# Altium PCB EMI-11-AF-001_IdtBV1.PcbDoc (part 2 of 2)
Units mm, origin at the board's own origin, x right, y up, seen from the top; angles counter-clockwise.
Board outline 22 x 20.01 mm, 4 copper layers (Top, Signal 1, Signal 2, Bottom), stack 1.02 mm thick; 56 components, 40 nets, 164 pads, 99 vias.
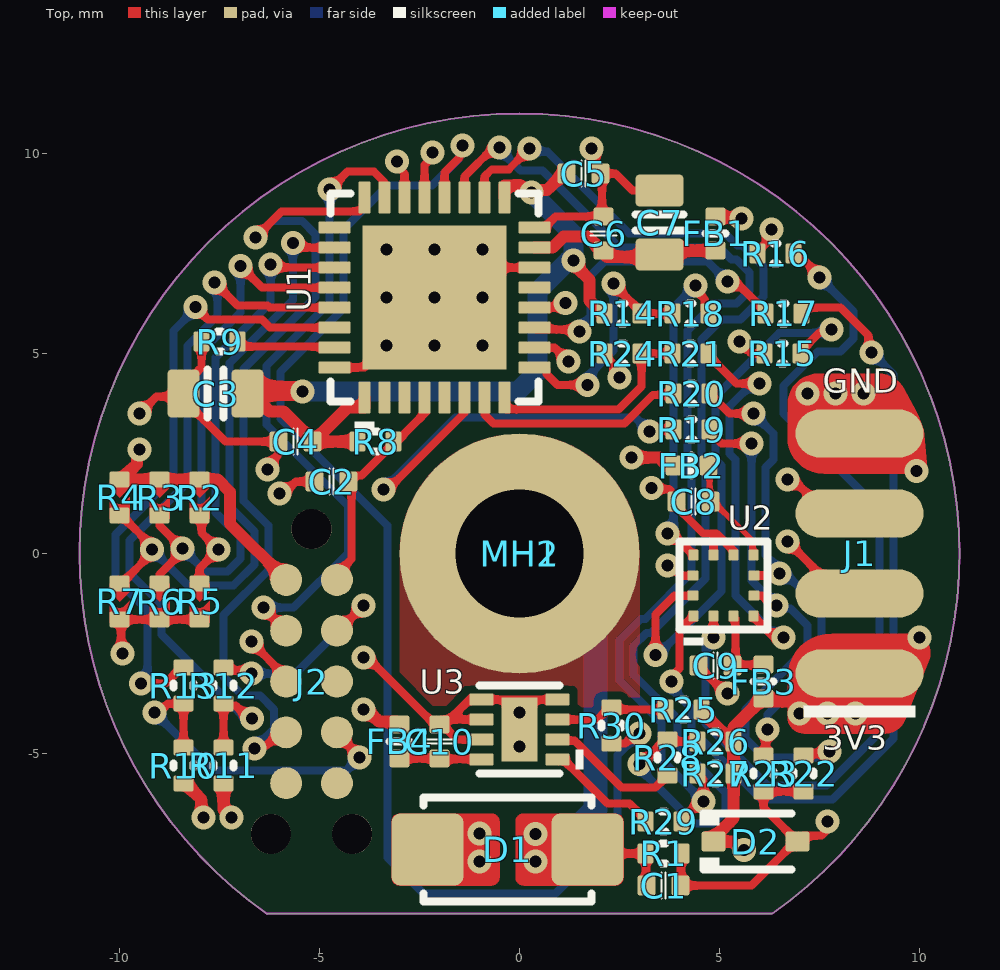
[diagram p0: Top view]

## Via types
v1: diameter 0.6, hole 0.3, Top to Bottom, tented both sides, 88 vias
v2: diameter 0.7, hole 0.3, Top to Bottom, tented bottom, 9 vias
v3: diameter 0.7, hole 0.3, Top to Bottom, tented both sides, 2 vias

## Nets (pads, with @x,y where several pads share a name; then routed paths per layer and width w, separated by ;. In a path a pad name is that pad's centre, name@x,y a point inside that pad or via, vN(x,y) a via of type N, cw(c..) or ccw(c..) an arc to the next point about the centre after c; other vN are vias at no path point) (continued)
DBG_UART.RX: (continued)
  Bottom w0.2: v1(-9.461,-3.25) -9.3,-3.089 -9.3,-1.425 -10.1,-0.625 -10.1,0.473 -8.65,1.923 -8.65,5.569 -8.105,6.114 v1(-8.105,6.165)
DBG_UART.TX: R11.2 R12.2 U1.29 | length 18.3
  Top w0.2: v1(-7.625,6.775) -7.05,6.2 -6.338,6.2 ; R11.2@-7.4,-4.8 -7.4,-3.8 -7.1,-3.8 -6.775,-4.125 v1(-6.685,-4.125) ; -6.338,6.2 -6.296,6.2 -6.246,6.15 U1.29
  Bottom w0.2: v1(-7.625,6.775) -7.55,6.7 -7.55,5.943 -8.3,5.193 -8.3,1.778 -9.75,0.328 -9.75,-0.48 -8.95,-1.28 -8.95,-2.023 -6.848,-4.125 v1(-6.685,-4.125)
GND: C1.1 C2.2 C3.2 C4.2 C5.2 C6.2 C7.2 C8.2 C9.2 C10.2 D1.1 D2.2 J1.4 J2.3 R1.1 R5.2 R6.2 R7.2 R9.2 R22.2 R23.2 R24.2 U1.14 U1.16 U1.32 U1.33 U2.8 U2.9 U2.11 U3.4 U3.5 U3.6 U3.7 U3.9 | length 45
  Top w0.2: v1(-9.925,-2.5) -9.963,-2.463 -9.963,-1.687 R7.2 R6.2 R5.2 ; v1(-9.5,3.5) -9.076,3.924 C3.2@-8.504,3.924 ; R9.2 -7.95,4.65 -8.4,4.2 C3.2 -8.476,3.924 C3.2@-8.504,3.924 ; v1@-6.733,-2.19 -5.835,-3.087 J2.3 ; v1(-6.3,2.1) -6.3,2.208 -6.025,2.483 C4.2 -7.35,2.8 -8.073,3.523 -8.103,3.523 C3.2@-8.504,3.924 ; v1(-6,1.5) -5.892,1.5 -5.592,1.8 C2.2 ; U1.32 -3.875,4.65 v2(-3.325,5.2) v2(-2.125,6.4) -1.375,7.15 U1.14 ; v1(-3.9,-2.6) -3.8,-2.6 -2.1,-4.3 C10.2@-2,-4.2 ; U3.7 -1.55,-4.65 C10.2@-2,-4.2 ; U3.6 -1.75,-4.15 ; U1.16 0.625,8.15 0.9,8.425 C6.2 2.062,8.463 2.062,9.462 C5.2 ; U3.4 U3.5 -1.25,-3.65 -1.75,-4.15 ; v1(1.8,10.125) 1.8,10.017 1.9,9.918 1.9,9.625 C5.2 ; R24.2 2.125,4.95 2.423,4.652 2.423,4.477 v1(2.5,4.4) ; v1(3.303,1.639) 3.332,1.609 3.739,1.609 3.925,1.424 C8.2 3.925,1.17 4.595,0.5 4.85,0.5 ; C7.2 2.825,9.075 2.4,9.5 C5.2 ; v1(3.7,-0.3) 3.7,-0.2 4.05,-0.55 U2.11 ; R1.1 4.038,-7.513 4.038,-8.287 C1.1 5.8,-8.3 D2.2@6.9,-7.2 ; C9.2 4.475,-2.825 5.15,-3.5 v1(5.2,-3.5) ; U2.9 4.85,0.5 ; U2.8 5.35,0.075 4.925,0.5 4.85,0.5 ; R23.2 6.1,-6.35 D2.2 7.1,-7.05 7.55,-7.05 7.7,-6.9 v1(7.7,-6.7) ; R23.2@6.15,-5.95 R22.2 ; C10.2@-2,-4.2 -1.95,-4.15 -1.75,-4.15
  other v1: -1,-7.7 -1,-7 -6.7,-2.2 9.926,2.069 7.2,4 7.9,4 8.6,4
  other v2: -2.125,5.2 -0.925,5.2 -3.325,6.4 -0.925,6.4 -3.325,7.6 -2.125,7.6 -0.925,7.6
  other v3: 0,-4.825 0,-3.975
I2C.SCL: R26.2 R28.2 U1.18 | length 30.2
  Top w0.2: U1.18 -0.875,9.425 -0.693,9.607 -0.269,9.607 0.247,10.122 0.247,10.125 v1(0.25,10.125) ; v1(3,-5.267) 3.034,-5.267 3.65,-4.65 R28.2 3.75,-4.7 R26.2
  Bottom w0.2: v1@0.446,10.125 0.35,10.125 v1(0.25,10.125) 0.327,10.049 0.694,10.049 2.743,8 5.143,8 5.443,7.7 5.573,7.7 6.1,7.173 6.1,6.427 5.523,5.85 5.05,5.85 4.55,5.35 4.55,2.205 4.65,2.105 4.65,-0.623 3.288,-1.984 3.176,-1.984 2.854,-2.307 2.854,-3.031 3.95,-4.128 3.95,-4.772 5.15,-5.972 5.15,-6.428 4.828,-6.75 4.372,-6.75 3,-5.378 v1(3,-5.267)
I2C.SDA: R27.2 R29.2 U1.19 | length 26.7
  Top w0.2: U1.19 -1.375,9.425 -0.643,10.157 v1(-0.5,10.157) ; R29.2 4.05,-6.65 4.5,-6.2 v1(4.6,-6.2) 4.6,-5.65 R27.2
  Bottom w0.2: v1(-0.5,10.157) -0.5,10.098 0.022,9.575 0.573,9.575 2.498,7.65 4.998,7.65 5.298,7.35 5.428,7.35 5.75,7.028 5.75,6.572 5.428,6.25 4.875,6.25 4.2,5.575 4.2,2.06 4.3,1.96 4.3,-0.478 3.143,-1.634 3.031,-1.634 2.504,-2.162 2.504,-3.176 3.55,-4.223 3.55,-5.15 v1(4.6,-6.2)
MCU_HW_VER0: R4.2 R7.1 U1.26 | length 15.6
  Top w0.2: R7.1 -9.95,-0.75 -9.193,0.007 v1(-9.193,0.107) -9.193,0.193 -9.95,0.95 R4.2 ; v1(-5.669,7.769) -5.55,7.65 U1.26
  Bottom w0.2: v1(-9.193,0.107) -8.287,-0.8 -7.156,-0.8 -6.628,-0.272 -6.628,0.55 -7.25,1.172 -7.25,4.758 -5.669,6.339 v1(-5.669,7.769)
MCU_HW_VER1: R3.2 R6.1 U1.27 | length 13.7
  Top w0.2: R6.1 -9,-0.525 -8.502,-0.027 -8.502,0.048 v1(-8.425,0.125) ; R3.2 -9,0.7 v1@-8.502,0.202 ; v1(-6.225,7.225) -6.15,7.15 U1.27
  Bottom w0.2: v1(-8.425,0.125) -7.85,-0.45 -7.301,-0.45 -6.978,-0.127 -6.978,0.405 -7.6,1.027 -7.6,4.903 -6.225,6.278 v1(-6.225,7.225)
MCU_HW_VER2: R2.2 R5.1 U1.28 | length 12.4
  Top w0.2: R5.1 -8,-0.372 v1(-7.528,0.1) -7.95,0.522 -7.95,0.95 R2.2 ; v1(-6.975,7.186) -6.439,6.65 U1.28
  Bottom w0.2: v1(-7.528,0.1) -7.528,0.105 -7.95,0.527 -7.95,5.048 -6.975,6.023 v1(-6.975,7.186)
NetC6_1: C6.1 C7.1 FB1.1 U1.15 | length 5
  Top w0.3: U1.15 0.827,7.65 1.075,7.898 1.102,7.924 1.695,7.924 2.12,7.5 2.1,7.5 2.188,7.413 3.488,7.413 3.65,7.575 FB1.1
NetC8_1: C8.1 FB2.1 U2.7 | length 2.7
  Top w0.15: FB2.1 4.75,2.175 4.75,1.399 5.824,0.325 5.824,-0.011 U2.7
NetC9_1: C9.1 FB3.1 U2.3 | length 2.1
  Top w0.2: C9.1 C9.1@5.338,-2.788 ; U2.3 5.35,-1.575 5.4,-1.625 5.4,-2.725 C9.1@5.338,-2.788 ; FB3.1 6.088,-2.788 C9.1@5.338,-2.788
NetC10_1: C10.1 FB4.1 U3.8 | length 2.1
  Top w0.2: FB4.1 C10.1 -1.988,-5.138 -0.963,-5.138 U3.8
NetJ2_7: J2.7 R10.2 R13.1 | length 8.6
  Top w0.2: v1(-9.125,-3.975) -9.017,-3.975 -8.792,-3.75 R13.1 R10.2 ; J2.7 -4.565,-4.502 -4,-5.068 v1(-4,-5.1)
  Bottom w0.2: v1(-9.125,-3.975) -7.675,-5.425 -4.325,-5.425 v1(-4,-5.1)
NetJ2_9: J2.9 R12.1 | length 5.3
  Top w0.2: R12.1@-7.4,-2.8 -7.277,-2.923 -6.777,-2.923 v1(-6.7,-3) ; J2.9 -4.548,-1.948 v1(-3.9,-1.3)
  Bottom w0.2: v1@-6.738,-2.962 v1(-6.7,-3) -5.6,-3 v1(-3.9,-1.3)
NetR9_1: R9.1 U1.31 | length 2.4
  Top w0.2: R9.1@-6.975,5.2 -6.95,5.175 -4.65,5.175 U1.31
NetR15_1: R15.1 U2.12 | length 14
  Top w0.2: v1(3.404,-2.534) 3.4,-2.531 3.4,-1.522 3.872,-1.05 U2.12 ; R15.1 7.025,5.05 7.499,5.523 7.723,5.523 v1(7.8,5.6)
  Bottom w0.2: v1(3.404,-2.534) 3.457,-2.534 5.05,-0.942 5.05,0.218 5.05,2.2 4.9,2.35 4.9,3.922 5.728,4.75 6.493,5.515 v1@7.8,5.515
NetR16_1: R16.1 U2.2 | length 22.9
  Top w0.2: v1(4.85,-2.1) U2.2 ; R16.1@6.925,7.5 6.95,7.5 7.5,6.95 v1(7.5,6.9)
  Bottom w0.2: v1(4.85,-2.1) 4.65,-2.3 4.65,-4.25 6.2,-5.8 7.678,-5.8 9,-4.478 9,1.1 6.6,3.5 6.6,4.192 7.458,5.05 8.028,5.05 8.35,5.372 8.35,6.05 v1(7.5,6.9)
NetR17_1: R17.1 U2.1 | length 22.1
  Top w0.2: v1(3.8,-3.2) 3.8,-3.078 4,-2.878 4,-1.912 U2.1 ; R17.1 7.05,6.05 7.15,6.15 8.028,6.15 8.724,5.454 8.724,5.102 v1(8.8,5.025)
  Bottom w0.2: v1(3.8,-3.2) 3.8,-3.373 4.3,-3.873 4.3,-4.4 6.05,-6.15 7.823,-6.15 9.35,-4.623 9.35,4.476 v1(8.8,5.025)
NetR18_1: R18.1 U2.10 | length 8.2
  Top w0.2: v1(3.7,0.5) 3.813,0.5 U2.10 ; v1(4.4,6.7) 4.4,6.592 4.625,6.367 4.625,6.1 R18.1
  Bottom w0.2: v1(3.7,0.5) 3.7,0.608 3.85,0.758 3.85,1.408 3.853,1.411 3.853,1.912 3.85,1.915 3.85,6.15 v1(4.4,6.7)
NetR19_1: R19.1 R22.1 U2.5 | length 13.7
  Top w0.2: R19.1 4.75,3.05 5.05,2.75 v1(5.8,2.75) ; U2.5 6.067,-1.05 6.317,-1.3 v1(6.425,-1.3) ; R22.1 7.15,-5 7.7,-5 v1(7.75,-4.95)
  Bottom w0.2: v1(5.8,2.75) 5.8,-0.675 v1(6.425,-1.3) 6.497,-1.372 6.772,-1.372 7.2,-1.8 7.2,-2.35 5.65,-3.9 5.65,-4.628 6.122,-5.1 7.6,-5.1 v1(7.75,-4.95)
NetR20_1: R20.1 R23.1 U2.6 | length 12
  Top w0.2: R20.1 5.25,3.5 v1(5.845,3.5) ; U2.6 v1@6.45,-0.55 ; R23.1 6.15,-5 6.15,-4.45 v1(6.2,-4.4)
  Bottom w0.2: v1(5.845,3.5) 6.35,2.995 6.35,2.35 6.15,2.15 6.15,-0.042 6.5,-0.392 v1(6.5,-0.5) 6.648,-0.5 7.55,-1.402 7.55,-2.672 6.2,-4.022 v1(6.2,-4.4)
NetR21_1: R21.1 U2.4 | length 10
  Top w0.2: R21.1 4.725,4.95 5.425,4.25 v1(6.006,4.25) ; U2.4 5.85,-1.575 6.375,-2.1 v1(6.6,-2.1)
  Bottom w0.2: v1(6.006,4.25) 5.817,4.25 5.25,3.683 5.25,2.495 5.4,2.345 5.4,-1.053 6.447,-2.1 v1(6.6,-2.1)
NetR25_2: R25.2 R30.1 U3.3 | length 2.8
  Top w0.2: U3.3 1.95,-4.15 2.25,-3.85 R30.1 2.35,-3.9 R25.2
NetR28_1: R28.1 U3.2 | length 3.4
  Top w0.2: U3.2 0.975,-4.675 1.375,-4.675 2.55,-5.85 3.4,-5.85 R28.1
NetR29_1: R29.1 U3.1 | length 2.9
  Top w0.2: U3.1 1.1,-5.15 2.2,-6.25 2.75,-6.25 3.15,-6.65 R29.1
nRST: C2.1 J2.10 R8.2 U1.4 | length 5.6
  Top w0.2: J2.10 -4.565,-0.498 -4.2,-0.132 -4.2,1.8 -4.05,1.95 -3.95,1.95 -3.1,2.8 -3.05,2.8 -2.9,2.95 -2.9,2.975 -2.375,3.5 U1.4
SHIELD: C1.2 D1.2 MH1.1 R1.2 | length 11.9
  Top w0.2: D1.2 1.8,-7.5 R1.2 3.163,-7.512 3.163,-8.287 C1.2
  Bottom w0.6: MH1.1 1.9,-1.9 1.9,-6.4 1.29,-7.01 v1(0.4,-7.01) v1(0.4,-7.7)
SPI.MISO: R17.2 U1.11 | length 7.8
  Top w0.2: U1.11 0.425,5.6 1.45,5.6 v1(1.5,5.55) ; v1(5.2,6.8) 5.4,6.8 6.15,6.05 R17.2
  Bottom w0.2: v1(1.5,5.55) 1.5,5.65 1.774,5.925 1.774,6.952 2.122,7.3 4.7,7.3 v1(5.2,6.8)
SPI.MOSI: R16.2 U1.12 | length 7.6
  Top w0.2: U1.12 1.039,6.15 v1(1.15,6.261) ; v1@1.015,6.15 v1@1.027,6.138 ; R16.2@5.9,7.5 6.227,7.827 6.227,8.02 v1(6.304,8.096)
  Signal 2 w0.2: v1(1.15,6.261) 1.211,6.2 2.867,6.2 4.017,7.35 5.55,7.35 6.296,8.096 v1(6.304,8.096)
SPI.SCK: R15.2 U1.10 | length 6.2
  Top w0.2: U1.10 0.875,5.15 v1(1.225,4.8) ; v1(5.5,5.3) 5.8,5 R15.2
  Signal 2 w0.2: v1(1.225,4.8) 2.122,4.8 2.622,5.3 v1(5.5,5.3)
SWD.SWCLK: J2.4 U1.24 | length 21.3
  Top w0.2: v1(-6.625,-4.875) -6.549,-4.799 -6.326,-4.799 -5.997,-4.47 J2.4 ; v1(-6.6,7.9) -5.95,8.55 -4.425,8.55 -4.013,8.55 -3.875,8.688 U1.24
  Bottom w0.2: v1(-6.625,-4.875) -6.135,-4.385 -6.135,-3.897 -6.483,-3.55 -6.928,-3.55 -7.4,-3.078 -7.4,-1.539 -6.278,-0.417 -6.278,0.695 -6.9,1.317 -6.9,4.613 -5.1,6.413 -5.1,7.978 -5.441,8.319 -6.181,8.319 v1(-6.6,7.9)
SWD.SWDIO: J2.2 U1.23 | length 16.6
  Top w0.2: v1(-6.4,-1.35) -6.4,-1.365 J2.2 ; -4.437,9.394 -4.732,9.1 v1(-4.75,9.1) -4.3,9.55 -3.644,9.55 -3.375,9.281 U1.23
  Bottom w0.2: v1(-6.4,-1.35) -5.65,-1.35 -4.292,0.008 -4.292,1.192 -6.331,3.231 -6.331,4.687 -4.75,6.268 v1(-4.75,9.1)
TS_ALERT: R30.2 U1.20 | length 32.9
  Top w0.2: U1.20 -1.875,9.525 -1.502,9.898 ; R30.2 2.642,-4.75 2.892,-4.5 v1(3,-4.5)
  Bottom w0.2: v1(-1.425,10.2) -1.502,10.123 -1.502,9.889 -2.188,9.203 -3.297,9.203 -4.4,8.1 -4.4,6.123 -5.981,4.542 -5.981,3.376 -3.3,0.695 -3.3,-7.6 -2.4,-8.5 0.9,-8.5 2.45,-6.95 2.45,-5.039 2.989,-4.5 v1(3,-4.5)
pads on no net: J2.0 J2.5 J2.6 J2.8 U1.2 U1.3 U1.5 U1.13 U1.25

## Polygon pours and split planes (outlines as drawn)
3V3 on Signal 2 "Signal 2-GND" (solid, remove dead copper, pour order 26): -6.308,-9 6.324,-9 ccw(c-0.056,0.029) 11,0 ccw(c0.029,0.029) 0,11 ccw(c-0.103,0.103) -11,0 ccw(c-0.413,-0.204)
GND on Signal 2 "Signal 2-GND 1" (solid, remove dead copper, pour order 24): 3.2,-4.2 3.2,0 ccw(c0,0) -3.2,0 -3.2,-4.2 ccw(c-1.899,-4.2) -1.898,-5.501 1.898,-5.501 ccw(c1.898,-4.2)
GND on Signal 1 "Signal 1-GND" (solid, remove dead copper, pour order 22): -6.308,-9 6.324,-9 ccw(c-0.056,0.029) 11,0 ccw(c0.029,0.029) 0,11 ccw(c-0.103,0.103) -11,0 ccw(c-0.413,-0.204)
SHIELD on Top "Top-SHIELD" (solid, pour order 18): -3,0 cw(c0,0) 3,0 3,-4.3 -3,-4.3
GND on Bottom "Bottom-GND" (solid, remove dead copper, pour order 28): -6.308,-9 6.324,-9 ccw(c-0.056,0.029) 11,0 ccw(c0.029,0.029) 0,11 ccw(c-0.103,0.103) -11,0 ccw(c-0.413,-0.204)

## Keep-outs
Keep-Out Layer:
  lines w0.05: -6.308,-9.012 cw(c0,0) -11,0 cw(c0,0) 11,0 cw(c0,0) 6.324,-9 -6.308,-9

## Other copper
Top:
  region net 3V3: 7.1,-4.5 9.152,-4.5 ccw(c9.152,-3.984) 9.632,-4.175 10.239,-2.653 ccw(c9.797,-2.477) 9.797,-2 7.8,-2 ccw(c7.8,-3.1) 6.7,-3.1 6.7,-4.1 ccw(c7.1,-4.1)
  region net GND: 10.2,2 7.6,2 cw(c7.6,2.9) 6.7,2.9 6.7,3.722 cw(c7.478,3.722) 7.478,4.5 8.958,4.5 cw(c8.958,3.728) 9.684,3.99 9.93,3.531 cw(c8.399,2.71) 10.047,3.259 10.1,3.1
  region net SHIELD: 2.6,-6.7 2.6,-8.1 cw(c2.4,-8.1) 2.4,-8.3 0.1,-8.3 cw(c0.1,-8.1) -0.1,-8.1 -0.1,-6.7 cw(c0.1,-6.7) 0.1,-6.5 2.4,-6.5 cw(c2.4,-6.7)
  region net GND: -3.2,-8.1 -3.2,-6.7 cw(c-3,-6.7) -3,-6.5 -0.7,-6.5 cw(c-0.7,-6.7) -0.5,-6.7 -0.5,-8.1 cw(c-0.7,-8.1) -0.7,-8.3 -3,-8.3 cw(c-3,-8.1)
  pour cut-out: -0.001,3.399 ccw(c-0.002,0.001) -3.4,0 -3.47,-5.909 -3,-5.909 -3,0 cw(c-0.004,0.004) 0,3 cw(c-0.004,-0.004) 3,0 3,-5.2 -2.9,-5.2 -2.9,-5.909 3,-5.909 3.4,-5.909 3.4,0 ccw(c0.001,0)
  pour cut-out: -2.6,-3.8 -1.4,-3.8 -1.25,-3.65 -0.5,-3.65 -0.5,-4.9 -2.6,-4.9
  pour cut-out: -10.35,-1.2 -10.4,-1.25 -10.4,-2.7 -8.8,-2.7 -8.8,-2.3 -6.4,-2.3 -6.4,-0.4 -7.5,-0.4 -7.5,-1.2
Signal 1:
  pour cut-out: -0.001,3.399 ccw(c-0.002,0.001) -3.4,0 -3.4,-4.2 ccw(c-1.903,-4.2) -1.908,-5.697 -0.1,-5.704 -0.1,-5.3 -1.896,-5.3 cw(c-1.896,-4.211) -2.985,-4.215 -3,0 cw(c-0.011,0.011) 0,3 cw(c-0.004,-0.004) 3,0 3,-4.2 cw(c1.9,-4.2) 1.9,-5.3 0.1,-5.3 0.1,-5.703 1.897,-5.703 ccw(c1.897,-4.2) 3.4,-4.2 3.4,0 ccw(c0.001,0)
Signal 2:
  pour cut-out: -0.001,3.399 ccw(c-0.002,0.001) -3.4,0 -3.4,-4.2 ccw(c-1.903,-4.2) -1.908,-5.697 0,-5.704 0,-5.3 -1.896,-5.3 cw(c-1.896,-4.211) -2.985,-4.215 -3,0 cw(c-0.011,0.011) 0,3 cw(c-0.004,-0.004) 3,0 3,-4.2 cw(c1.9,-4.2) 1.9,-5.3 0.1,-5.3 0.1,-5.703 1.897,-5.703 ccw(c1.897,-4.2) 3.4,-4.2 3.4,0 ccw(c0.001,0)
Bottom:
  pour cut-out: -6.326,1.931 -6.326,1.031 -5.626,1.031 -5.626,1.931
  pour cut-out: -6.626,2.531 -6.626,1.631 -5.926,1.631 -5.926,2.531
  pour cut-out: -9.826,3.931 -9.826,3.031 -9.126,3.031 -9.126,3.931
  pour cut-out: -10.251,-2.069 -10.251,-2.969 -9.551,-2.969 -9.551,-2.069
  pour cut-out: -7.026,-1.769 -7.026,-2.669 -6.326,-2.669 -6.326,-1.769
  pour cut-out: -0.001,3.399 ccw(c-0.002,0.001) -3.4,0 -3.4,-8.088 0,-8.1 0,-7.6 -2.972,-7.6 -3,0 cw(c-0.011,0.011) 0,3 cw(c-0.004,-0.004) 3,0 3,-7.6 0.1,-7.6 0.1,-8.1 3.4,-8.1 3.4,0 ccw(c0.001,0)
  pour cut-out: 7.374,-6.269 7.374,-7.169 8.074,-7.169 8.074,-6.269
  pour cut-out: 4.874,-3.069 4.874,-3.969 5.574,-3.969 5.574,-3.069
  pour cut-out: 1.474,10.556 1.474,9.656 2.174,9.656 2.174,10.556
  pour cut-out: 2.174,4.831 2.174,3.931 2.874,3.931 2.874,4.831
  pour cut-out: -4.226,-2.169 -4.226,-3.069 -3.526,-3.069 -3.526,-2.169
  pour cut-out: 7.574,4.431 7.574,3.531 8.274,3.531 8.274,4.431
  pour cut-out: 6.874,4.431 6.874,3.531 7.574,3.531 7.574,4.431
  pour cut-out: 8.274,4.431 8.274,3.531 8.974,3.531 8.974,4.431
  pour cut-out: 9.6,2.5 9.6,1.6 10.3,1.6 10.3,2.5

## Silkscreen, mask and mechanical layers (free items; w line width, h text height)
Top Overlay:
  text "GND" at 7.575,4.025 h0.6
  text "3V3" at 7.575,-4.911 h0.6
Bottom Overlay:
  text "GND" at 10.1,2.53 h0.6
  text "CAN_RX" at 10.525,0.43 h0.6
  text "CAN_TX" at 10.5,-1.57 h0.6
  text "3V3" at 9.9,-3.47 h0.6
Info:
  circle w0.1: c0,0 r1.6
  circle w0.1: c0,0 r2.75

## Dimensions
11.504,0 to 7.2,-9 on Dim
11,0 to 3,11 on Dim
11,11.4 to -11,11.4 on Dim
-3,11 to -7.1,-9 on Dim